# Allegro board HF_filter_02v2.brd
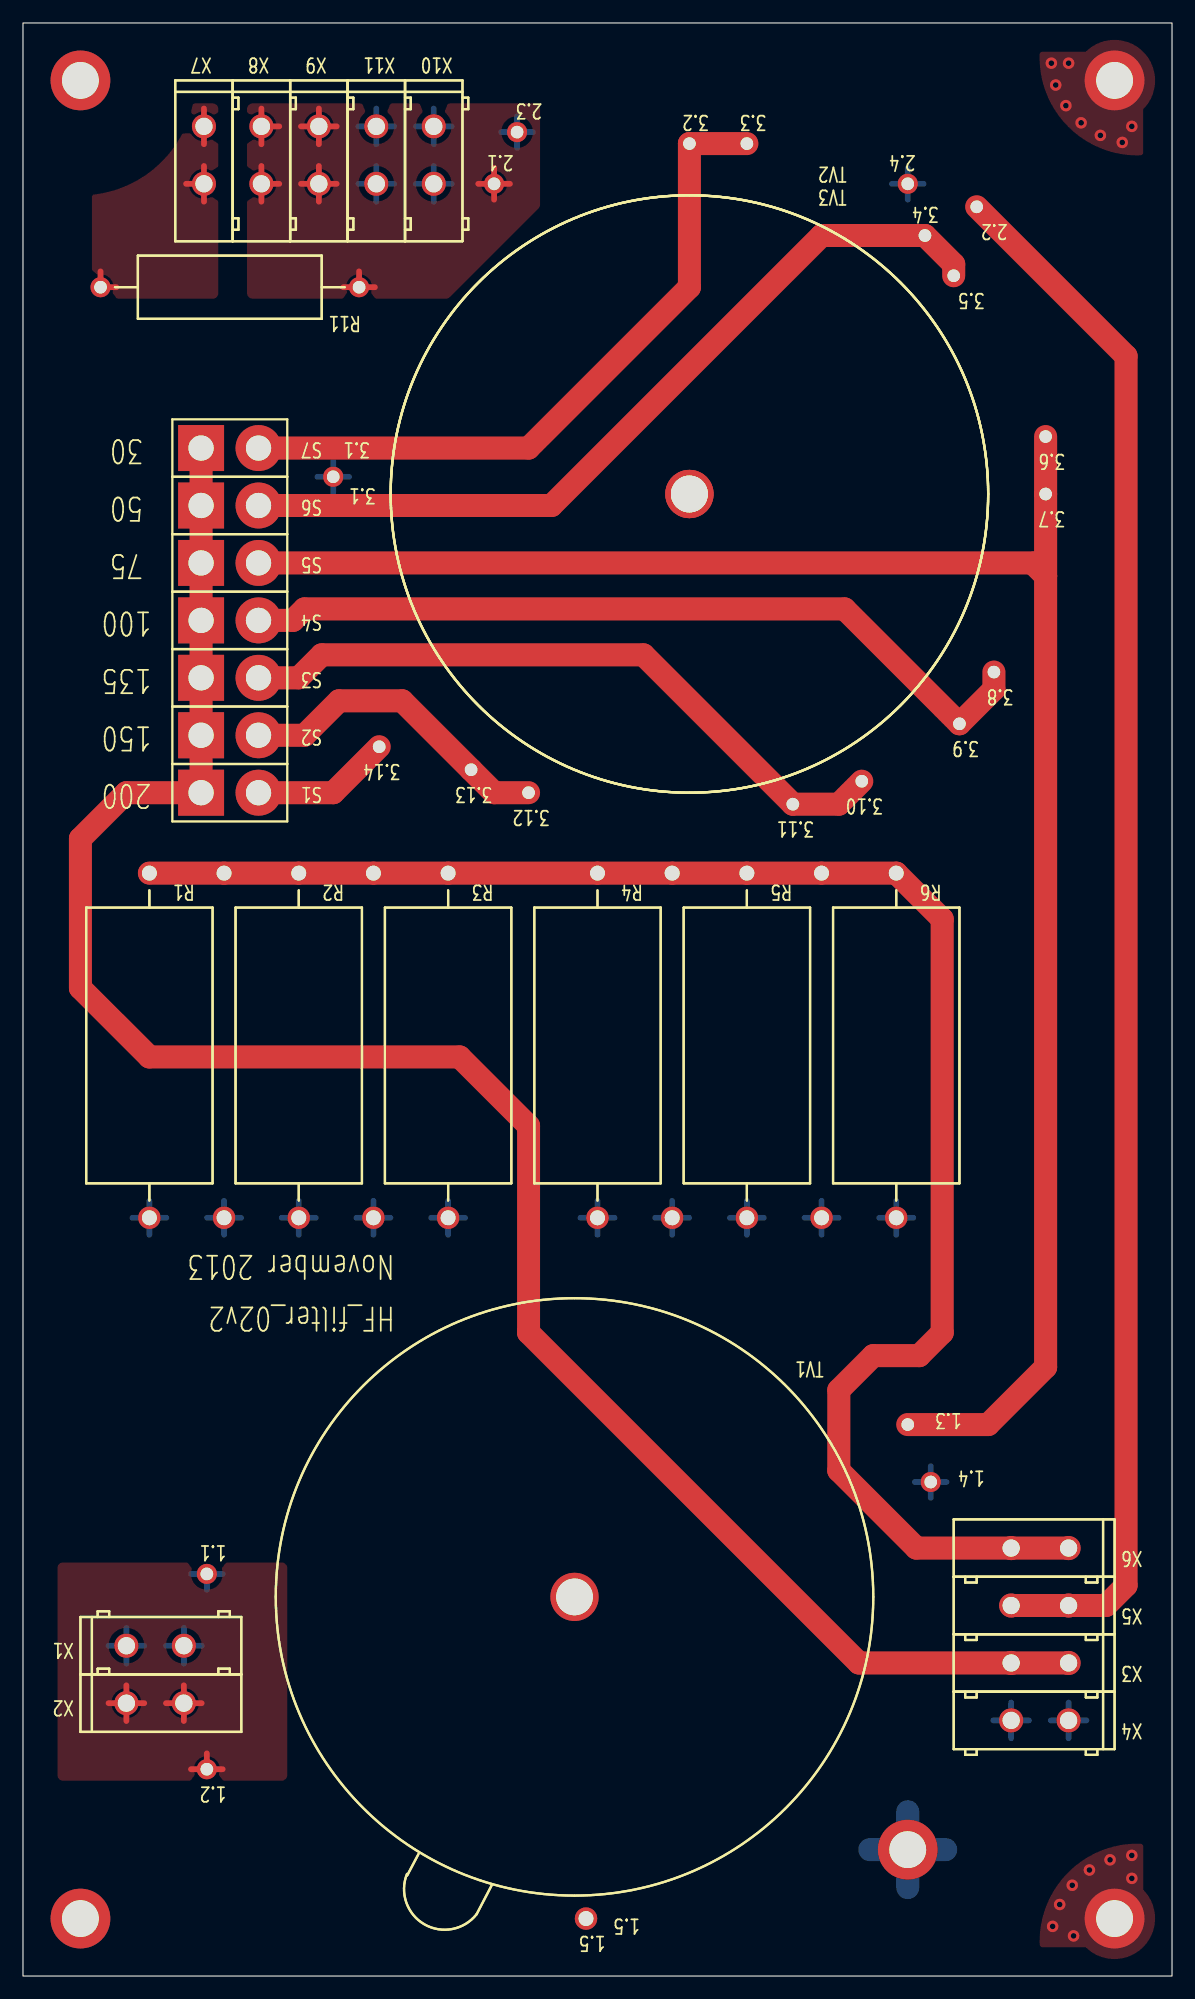
[diagram p0: board, top side]
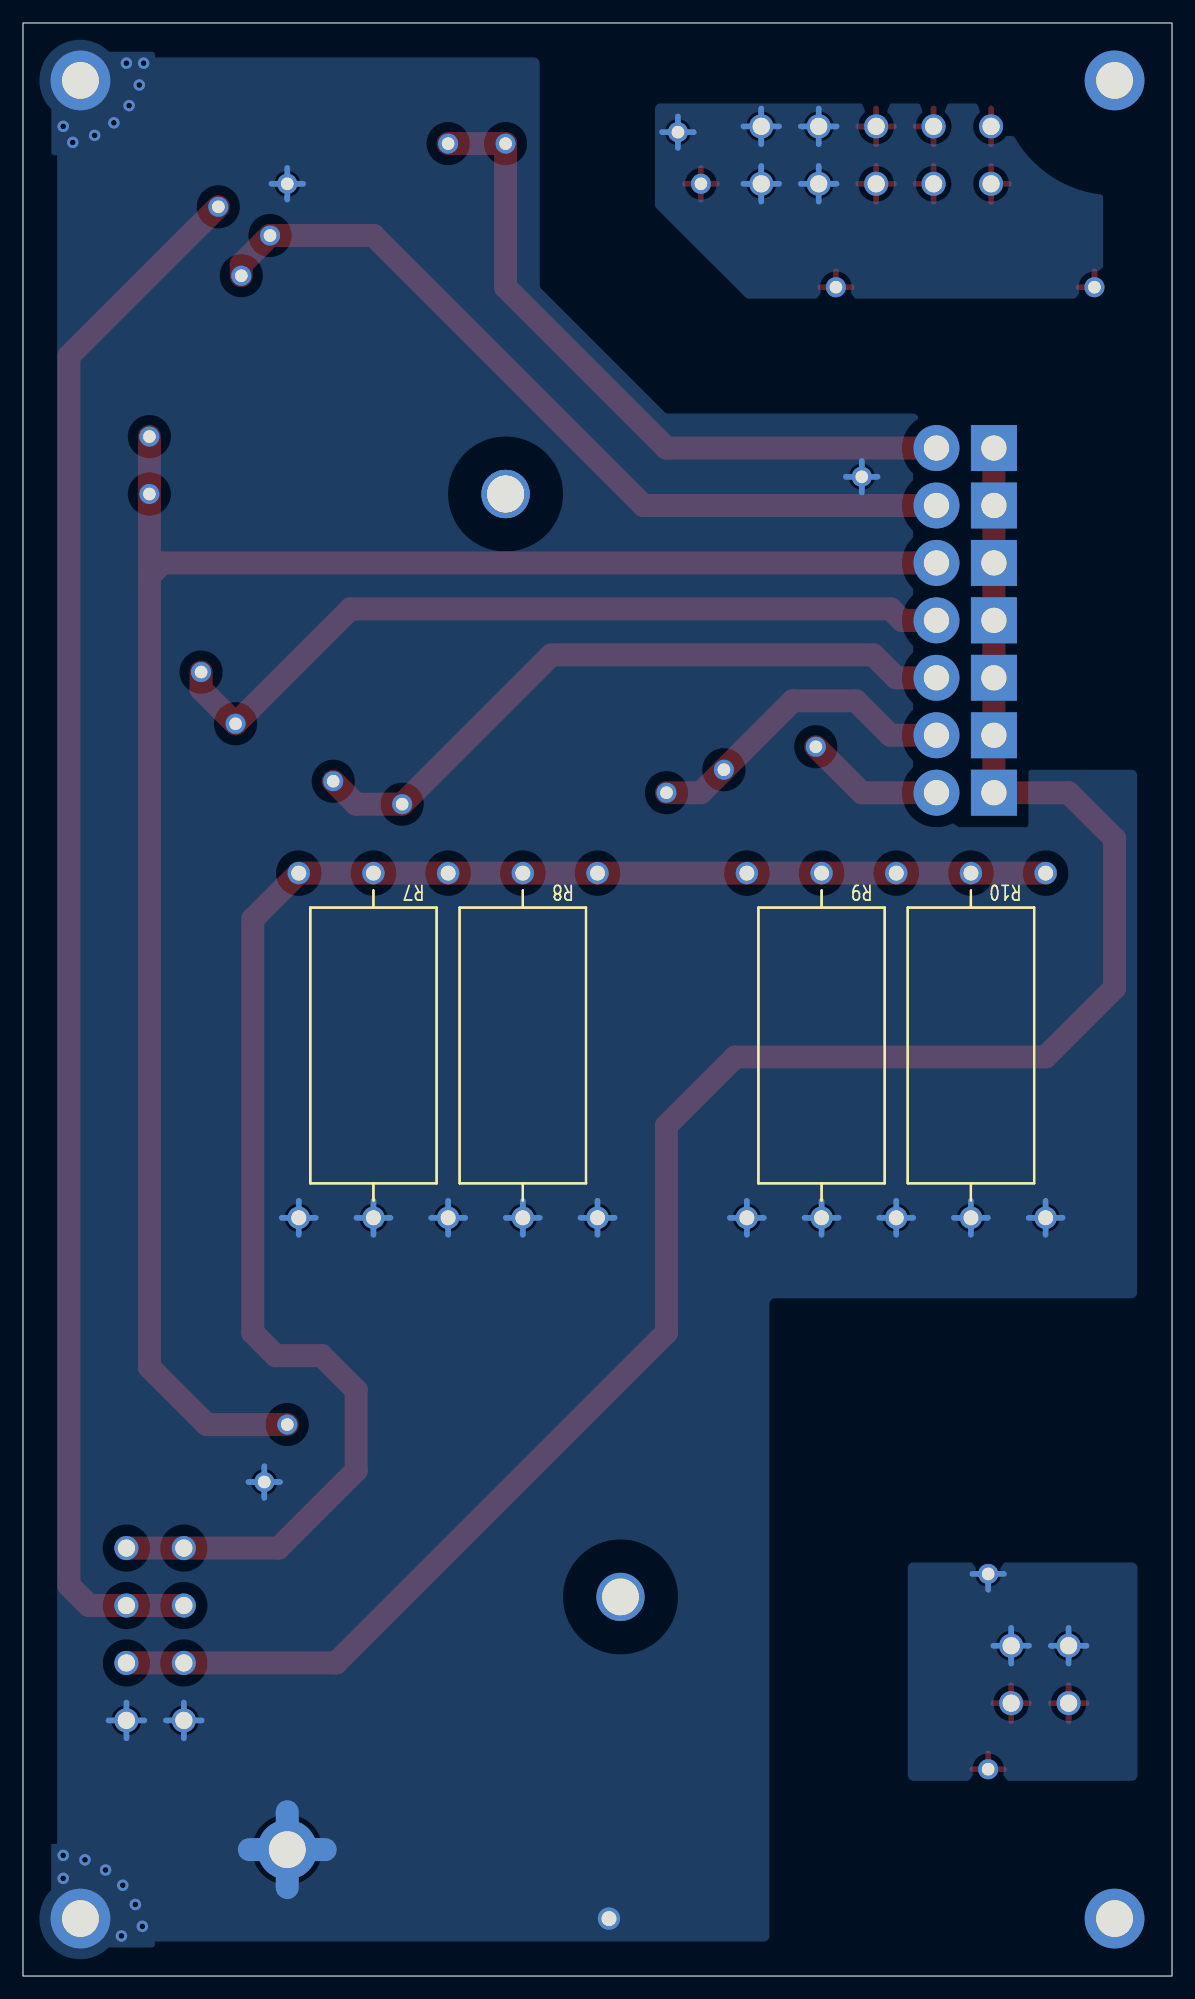
[diagram p1: board, bottom side, seen from below]

Outline 100 x 170 mm; copper layers: TOP, BOTTOM. Coordinates in mm from the lower left corner of the outline.
Outline path: rectangle 0,0 100,170

## Design rules (mm)
nets with their own width: min track width 0.5; nets GND

## Placement (name value [footprint] x y rotation side)
MH1  3mm  [MTG520H320_2]  77 11 0 top
MH2  3mm  [MTG520H320_2]  95 5 0 top
MH3  3mm  [MTG520H320_2]  95 165 0 top
NOREF  -  [unnamed]  5 165 0 top
NOREF#2  -  [unnamed]  5 5 0 top
R1  750  [RESAD3000W80L2350D1100P]  11 81 90 top
R2  750  [RESAD3000W80L2350D1100P]  24 81 90 top
R3  750  [RESAD3000W80L2350D1100P]  37 81 90 top
R4  750  [RESAD3000W80L2350D1100P]  50 81 90 top
R5  750  [RESAD3000W80L2350D1100P]  63 81 90 top
R6  750  [RESAD3000W80L2350D1100P]  76 81 270 top
R7  750  [RESAD3000W80L2350D1100P]  69.5 81 270 bottom
R8  750  [RESAD3000W80L2350D1100P]  56.5 81 270 bottom
R9  750  [RESAD3000W80L2350D1100P]  30.5 81 270 bottom
R10  750  [RESAD3000W80L2350D1100P]  17.5 81 270 bottom
R11  1  [RESAD2250W80L1550D500P]  18 147 180 top
S1  200  [SOCKET_H3161_2]  15.5 103 90 top
S2  150  [SOCKET_H3161_2]  15.5 108 90 top
S3  135  [SOCKET_H3161_2]  15.5 113 90 top
S4  100  [SOCKET_H3161_2]  15.5 118 90 top
S5  75  [SOCKET_H3161_2]  15.5 123 90 top
S6  50  [SOCKET_H3161_2]  15.5 128 90 top
S7  30  [SOCKET_H3161_2]  15.5 133 90 top
TV1  TCP_1.x  [XFMR_TCP_1_X]  48 33 105 top
TV2  TCF_1.0  [XFMR_TCF_1_0]  58 129 0 top
TV3  TCC_1.2x  [XFMR_TCC_1_2X]  58 129 270 top
X1  UM+  [WAGO_236_401]  11.5 28.75 0 top
X2  UM-  [WAGO_236_401]  11.5 23.75 0 top
X3  UM_  [WAGO_236_401]  88.5 27.25 180 top
X4  GND  [WAGO_236_401]  88.5 22.25 180 top
X5  OUT_  [WAGO_236_401]  88.5 32.25 180 top
X6  LOAD_  [WAGO_236_401]  88.5 37.25 180 top
X7  OUT_SH+  [WAGO_236_401]  15.75 158.5 270 top
X8  VAR+  [WAGO_236_401]  20.75 158.5 270 top
X9  OUT+  [WAGO_236_401]  25.75 158.5 270 top
X10  OUT-  [WAGO_236_401]  35.75 158.5 270 top
X11  VAR-  [WAGO_236_401]  30.75 158.5 270 top

## Library data of the parts
MH1-MH3 = MOUNTING_HOLE_PLATED
R1-R10 = RES_5W
R11 = RES_2W: alternate symbols: (RESADV500W80L1550D500P)
S1-S7 = D3080-05
TV1 = TCP_1x
TV2 = TCF_1_0
TV3 = TCC_1_2x
X1-X11 = CON_2

## Footprints (pads in the part's own frame, mm; a bottom-side part is the same pattern mirrored in y, then rotated)
MTG520H320_2
  round 5.2 hole 3.2: 1(0,0)
RESAD2250W80L1550D500P
  round 1.75 hole 1.1: 1(-11.25,0) 2(11.25,0)
RESAD3000W80L2350D1100P
  round 1.95 hole 1.3: 1(-15,0) 2(15,0)
SOCKET_H3161_2
  rect 4x4 hole 2.2: 1(0,0)
  round 4 hole 2.2: 2(0,-5)
unnamed
  round 5.2 hole 3.2: (0,0)
WAGO_236_401
  round 2.1 hole 1.5: 1(-2.5,0) 2(2.5,0)
XFMR_TCC_1_2X
  round 4.2 hole 3.2: (0,0)
  round 1.75 hole 1.1: 1(-1.5,-31) 2(-30.5,0) 3(-30.5,5) 4(-22.5,20.5) 5(-19,23) 6(-5,31) 7(0,31) 8(15.5,26.5) 9(20,23.5) 10(25,15) 11(27,9) 12(26,-14) 13(24,-19) 14(22,-27)
XFMR_TCF_1_0
  round 4.2 hole 3.2: (0,0)
  round 1.75 hole 1.1: 1(-17,27) 2(25,25) 3(-15,31.5) 4(19,27)
XFMR_TCP_1_X
  round 4.2 hole 3.2: (0,0)
  round 1.75 hole 1.1: 1(10.214,30.391) 2(-6.207,34.791) 3(6.984,-31.895) 4(1.636,-32.533)
  round 1.95 hole 1.3: 5(-27.305,6.28)

## Nets
GND: MH1.1 MH2.1 MH3.1 R1.1 R2.1 R3.1 R4.1 R5.1 R6.2 R7.2 R8.2 R9.2 R10.2 TV1.4 TV1.5(GND) TV2.4 TV3.1 X4.1 X4.2
N46119: TV1.1 X1.1 X1.2
N46131: TV1.2 X2.1 X2.2
N46819: S6.2 TV3.4 TV3.5
N46831: S7.2 TV3.2 TV3.3
N46967: S5.2 TV1.3 TV3.6 TV3.7
N46979: S4.2 TV3.8 TV3.9
N46991: S3.2 TV3.10 TV3.11
N47003: S2.2 TV3.12 TV3.13
N47091: S1.2 TV3.14
N57068: S1.1 S2.1 S3.1 S4.1 S5.1 S6.1 S7.1 X3.1 X3.2
N91853: TV2.2 X5.1 X5.2
N91922: R11.1 TV2.1 X8.1 X8.2 X9.1 X9.2
N91944: TV2.3 X10.1 X10.2 X11.1 X11.2
N103304: R1.2 R2.2 R3.2 R4.2 R5.2 R6.1 R7.1 R8.1 R9.1 R10.1 X6.1 X6.2
N107549: R11.2 X7.1 X7.2

## Via types
v1: diameter 1, hole 0.5, TOP to BOTTOM, 16 vias

## Routing (per net, layer and track width the routed paths; a pad name or vN(x,y) marks a point on that pad's centre or on a via; arc(x,y) is an arc through that point)
GND: length 101.2
  BOTTOM w0.5: 61.52,66 R5.1 ; R5.1 64.48,66 ; R5.1 63,64.52 ; R5.1 63,67.48 ; 30.5,64.52 R9.2 ; R9.2 31.98,66 ; R9.2 29.02,66 ; R9.2 30.5,67.48 ; 22.52,66 R2.1 ; R2.1 24,64.52 ; R2.1 25.48,66 ; R2.1 24,67.48 ; R10.2 17.5,67.48 ; R10.2 17.5,64.52 ; R10.2 18.98,66 ; R10.2 16.02,66 ; R7.2 69.5,67.48 ; R7.2 69.5,64.52 ; R7.2 70.98,66 ; R7.2 68.02,66 ; 77,154.62 TV2.4 ; TV2.4 77,157.38 ; TV2.4 75.62,156 ; TV2.4 78.38,156 ; 91,20.7 X4.1 ; X4.1 92.55,22.25 ; X4.1 89.45,22.25 ; X4.1 91,23.8 ; 76,64.52 R6.2 ; R6.2 74.52,66 ; R6.2 76,67.48 ; R6.2 77.48,66 ; R1.1 12.48,66 ; R1.1 11,67.48 ; R1.1 9.52,66 ; R1.1 11,64.52 ; 25.62,130.5 TV3.1 ; TV3.1 27,129.12 ; TV3.1 27,131.88 ; TV3.1 28.38,130.5 ; 79,41.62 79,43 ; 79,43 80.38,43 ; 79,43 79,44.38 ; 79,43 77.62,43 ; X4.2 87.55,22.25 ; X4.2 86,23.8 ; X4.2 84.45,22.25 ; X4.2 86,20.7 ; 35.52,66 R3.1 ; R3.1 37,67.48 ; R3.1 37,64.52 ; R3.1 38.48,66 ; 50,64.52 R4.1 ; R4.1 50,67.48 ; R4.1 48.52,66 ; R4.1 51.48,66 ; 55.02,66 R8.2 ; R8.2 56.5,67.48 ; R8.2 56.5,64.52 ; R8.2 57.98,66
  BOTTOM w2: 73.7,11 MH1.1 ; MH1.1 77,14.3 ; MH1.1 77,7.7 ; MH1.1 80.3,11
  vias: v1(89.5,166.5) v1(89.61,4.32) v1(89.88,164.6) v1(90.22,6.23) v1(90.76,162.81) v1(91,166.5) v1(91.32,7.9) v1(91.43,3.49) v1(92.09,161.31) v1(92.81,9.23) v1(93.77,160.22) v1(94.61,10.11) v1(95.67,159.6) v1(96.5,161) v1(96.5,10.5) v1(96.5,8.5)
N46119: length 16.5
  BOTTOM w0.5: 14.62,35 16,35 ; 16,35 16,33.62 ; 16,35 17.38,35 ; X1.2 15.55,28.75 ; X1.2 14,30.3 ; X1.2 12.45,28.75 ; X1.2 14,27.2 ; X1.1 9,30.3 ; X1.1 9,27.2 ; X1.1 7.45,28.75 ; X1.1 10.55,28.75
N46131: length 16.5
  TOP w0.5: 14.62,18 16,18 ; 16,18 17.38,18 ; 16,18 16,19.38 ; X2.2 14,25.3 ; X2.2 12.45,23.75 ; X2.2 14,22.2 ; X2.2 15.55,23.75 ; X2.1 10.55,23.75 ; X2.1 7.45,23.75 ; X2.1 9,22.2 ; X2.1 9,25.3
N46819: length 72.3
  TOP w2: S6.2 46,128 69.5,151.5 TV3.4 81,149 TV3.5
N46831: length 60.8
  TOP w2: S7.2 44,133 58,147 TV3.2 TV3.3
N46967: length 164.1
  TOP w2: 89,121.86 TV3.7 TV3.6 ; 89,121.86 89,53 84,48 77,48 ; 89,121.86 88,122.86 88,123 S5.2
N46979: length 71.3
  TOP w2: TV3.8 84.5,112 TV3.9 71.5,119 24.5,119 23.5,118 S4.2
N46991: length 59.5
  TOP w2: S3.2 24,113 26,115 54,115 TV3.11 71,102 TV3.10
N47003: length 28.1
  TOP w2: S2.2 24.5,108 27.5,111 33,111 TV3.13 41,103 TV3.12
N47091: length 12.2
  TOP w2: S1.2 27,103 TV3.14
N57068: length 176
  TOP w2: S7.1 S6.1 S5.1 S4.1 S3.1 S2.1 S1.1 9,103 5,99 5,86 11,80 38,80 44,74 44,56 72.75,27.25 X3.2 X3.1
N91853: length 136.1
  TOP w2: X5.2 X5.1 94.25,32.25 96,34 96,141 TV2.2
N91922: length 31.4
  TOP w0.5: 39.62,156 TV2.1 ; TV2.1 41,154.62 ; TV2.1 41,157.38 ; TV2.1 42.38,156 ; X9.1 25.75,162.55 ; X9.1 27.3,161 ; X9.1 24.2,161 ; X9.1 25.75,159.45 ; R11.1 30.63,147 ; R11.1 29.25,148.38 ; R11.1 27.87,147 ; 25.75,154.45 X9.2 ; X9.2 24.2,156 ; X9.2 25.75,157.55 ; X9.2 27.3,156 ; X8.2 22.3,156 ; X8.2 20.75,157.55 ; X8.2 20.75,154.45 ; X8.1 22.3,161 ; X8.1 20.75,159.45 ; X8.1 20.75,162.55
N91944: length 30.3
  BOTTOM w0.5: 35.75,159.45 X10.1 ; X10.1 34.2,161 ; X10.1 35.75,162.55 ; X10.1 37.3,161 ; 34.2,156 X10.2 ; X10.2 37.3,156 ; X10.2 35.75,157.55 ; X10.2 35.75,154.45 ; TV2.3 44.38,160.5 ; TV2.3 41.62,160.5 ; TV2.3 43,159.12 ; TV2.3 43,161.88 ; X11.2 32.3,156 ; X11.2 30.75,154.45 ; X11.2 29.2,156 ; X11.2 30.75,157.55 ; 29.2,161 X11.1 ; X11.1 30.75,162.55 ; X11.1 30.75,159.45 ; X11.1 32.3,161
N103304: length 147.5
  TOP w2: R1.2 R10.1 R2.2 R9.1 R3.2 R4.2 R8.1 R5.2 R7.1 R6.1 80,92 80,56 78,54 74,54 71,51 71,44 77.75,37.25 X6.2 X6.1
N107549: length 10.5
  TOP w0.5: 8.13,147 R11.2 6.75,148.38 ; 15.75,154.45 X7.2 ; X7.2 15.75,157.55 ; X7.2 14.2,156 ; 15.75,162.55 X7.1 15.75,159.45

## Copper pours and planes (outline as drawn; the poured copper is in the pictures)
GND on TOP: 97.49,158.49 90.97,160.97 88.49,167.49 92.49,167.49 97.49,167.49 97.49,162.49
GND on TOP: 97.49,7.51 97.49,2.51 92.49,2.51 88.49,2.51 90.97,9.03 97.49,11.51
GND on BOTTOM: 97.54,7.49 97.53,2.5 92.54,2.49 88.54,2.49 88.53,2.75 88.53,3 35.53,3 35.18,3.15 35.03,3.5 35.03,58.5 34.89,58.85 34.53,59 3.53,59 3.18,59.15 3.03,59.5 3.03,104.5 3.18,104.85 3.53,105 21.53,105 21.89,105.15 22.03,105.5 22.03,135.5 22.18,135.85 22.53,136 43.83,136 44.02,136.04 44.18,136.15 54.89,146.85 54.99,147.02 55.03,147.21 55.03,166.5 55.18,166.85 55.53,167 88.52,167 88.52,167.25 88.53,167.5 92.53,167.5 97.53,167.5 97.53,162.5 97.53,158.5 97.28,158.49 97.03,158.49 97.03,11.51 97.29,11.5 97.54,11.49
N46119 on BOTTOM: 3,17.5 3.15,17.15 3.5,17 22.5,17 22.85,17.15 23,17.5 23,35.5 22.85,35.85 22.5,36 3.5,36 3.15,35.85 3,35.5
N46131 on TOP: 3,17.5 3.15,17.15 3.5,17 22.5,17 22.85,17.15 23,17.5 23,35.5 22.85,35.85 22.5,36 3.5,36 3.15,35.85 3,35.5
N91922 on TOP: 44.5,163 44.85,162.85 45,162.5 45,154.21 44.96,154.02 44.85,153.85 37.15,146.15 36.98,146.04 36.79,146 20,146 19.65,146.15 19.5,146.5 19.5,162.5 19.65,162.85 20,163
N91944 on BOTTOM: 6,162.5 6.15,162.85 6.5,163 44.5,163 44.85,162.85 45,162.5 45,154.21 44.96,154.02 44.85,153.85 37.15,146.15 36.98,146.04 36.79,146 6.5,146 6.15,146.15 6,146.5
N107549 on TOP: 6.5,163 6.15,162.85 6,162.5 6,146.5 6.15,146.15 6.5,146 16.5,146 16.85,146.15 17,146.5 17,162.5 16.85,162.85 16.5,163

## Text on the board
Ref Des/Assembly Bottom: 4
Ref Des/Silkscreen Top: 1.1 | 1.2 | 3.1 | 3.14 | 3.13 | 2.1 | 2.3 | 3.12 | 1.5 | 3.2 | 3.3 | 3.11 | 3.10 | 2.4 | 3.4 | 1.3 | 3.9 | 3.5 | 1.4 | 2.2 | 3.8 | 3.6 | 3.7 | November 2013 | HF_filter_02v2
DEVICE_TYPE_TOP: 1.1 | 1.2 | 3.1 | 3.14 | 3.13 | 2.1 | 2.3 | 3.12 | 1.5 | 3.2 | 3.3 | 3.11 | 3.10 | 2.4 | 3.4 | 1.3 | 3.9 | 3.5 | 1.4 | 2.2 | 3.8 | 3.6 | 3.7 | November 2013 | HF_filter_02v2
COMPVAL_TYPE_TOP: FIGURE | SIZE | 0.5 | 1.1 | 1.3 | 1.5 | 2.2 | 3.2 | DRILL CHART: TOP to BOTTOM | ALL UNITS ARE IN MILLIMETERS | PLATED | QTY | 16 | 24 | 21 | 22 | 14 | 8
